# EAGLE board brushless (EAGLE 4.16)
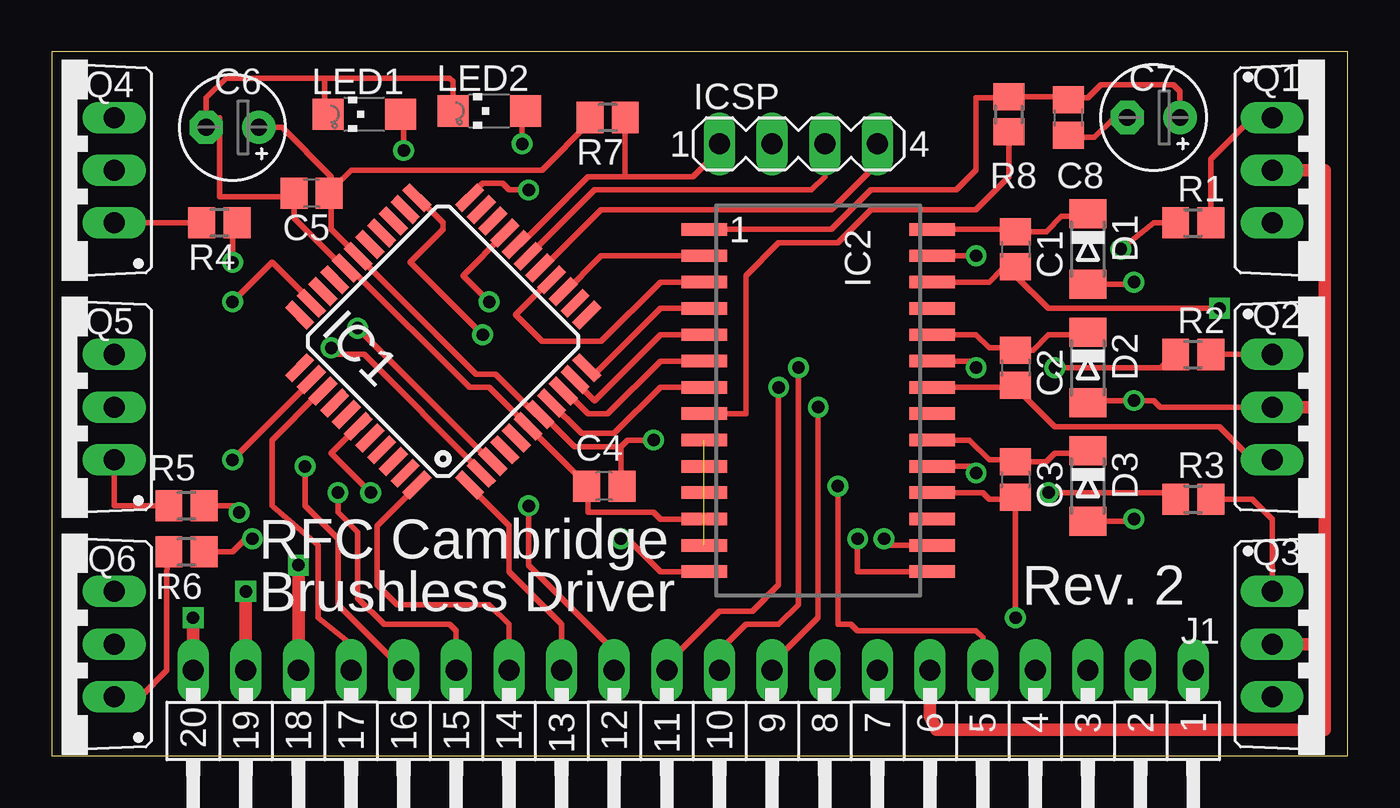
[diagram p0: board, top side]
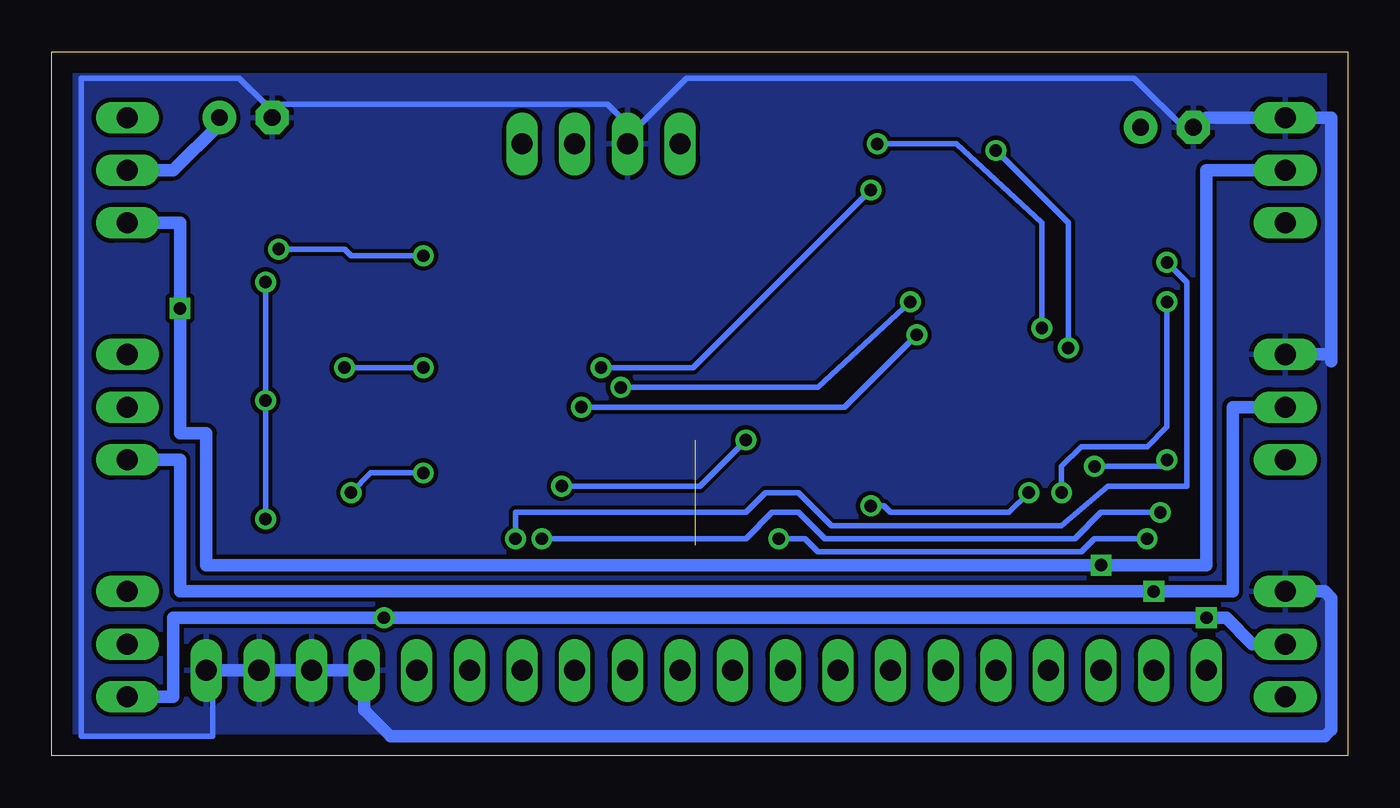
[diagram p1: board, bottom side, seen from below]

Size 62.54 x 33.96 mm. Coordinates in mm from the lower left corner, seen from the top.
Outline: 0,0 62.54,0 62.54,33.96 0,33.96 0,0
Copper layers (1*16): Top 0.035mm / dielectric 1.5mm / Bottom 0.035mm
Design rules "default": minimum track width 10mil, minimum drill 24mil, track to track 8mil, track to pad 8mil, pad to pad 8mil, via to via 8mil, smd to smd 8mil, copper to edge 40mil, drill to drill 8mil, minimum pad ring 10mil, minimum via ring 8mil, stop-mask expansion 4mil, vias tented up to drill 0mil, thermal gap 10mil

## Footprints (pad centres in the part's own frame; a part is rotated, then mirrored left to right if it is on the bottom)
C0805 = smd 1.3 x 1.5: 1 -0.85,0; 2 0.85,0
E2,5-5 = drill 0.813 pad 1.6 round: + -1.27,0 | drill 0.813 pad 1.6 octagon: - 1.27,0
MINIMELF = smd 1.4 x 1.8: A 1.7,0; C -1.7,0
TQFP44 = smd 1.5 x 0.5: 1 -5.8,4; 2 -5.8,3.2; 3 -5.8,2.4; 4 -5.8,1.6; 5 -5.8,0.8; 6 -5.8,0; 7 -5.8,-0.8; 8 -5.8,-1.6; 9 -5.8,-2.4; 10 -5.8,-3.2; 11 -5.8,-4; 23 5.8,-4; 24 5.8,-3.2; 25 5.8,-2.4; 26 5.8,-1.6; 27 5.8,-0.8; 28 5.8,0; 29 5.8,0.8; 30 5.8,1.6; 31 5.8,2.4; 32 5.8,3.2; 33 5.8,4 | smd 0.5 x 1.5: 12 -4,-5.8; 13 -3.2,-5.8; 14 -2.4,-5.8; 15 -1.6,-5.8; 16 -0.8,-5.8; 17 0,-5.8; 18 0.8,-5.8; 19 1.6,-5.8; 20 2.4,-5.8; 21 3.2,-5.8; 22 4,-5.8; 34 4,5.8; 35 3.2,5.8; 36 2.4,5.8; 37 1.6,5.8; 38 0.8,5.8; 39 0,5.8; 40 -0.8,5.8; 41 -1.6,5.8; 42 -2.4,5.8; 43 -3.2,5.8; 44 -4,5.8
SOP28 = smd 0.6 x 2.2: 1 -8.255,-5.5; 2 -6.985,-5.5; 3 -5.715,-5.5; 4 -4.445,-5.5; 5 -3.175,-5.5; 6 -1.905,-5.5; 7 -0.635,-5.5; 8 0.635,-5.5; 9 1.905,-5.5; 10 3.175,-5.5; 11 4.445,-5.5; 12 5.715,-5.5; 13 6.985,-5.5; 14 8.255,-5.5; 15 8.255,5.5; 16 6.985,5.5; 17 5.715,5.5; 18 4.445,5.5; 19 3.175,5.5; 20 1.905,5.5; 21 0.635,5.5; 22 -0.635,5.5; 23 -1.905,5.5; 24 -3.175,5.5; 25 -4.445,5.5; 26 -5.715,5.5; 27 -6.985,5.5; 28 -8.255,5.5
MA04-1 = drill 1.016 long: 1 -3.81,0; 2 -1.27,0; 3 1.27,0; 4 3.81,0
MA20-1W = drill 1.016 long: 1 -24.13,0; 2 -21.59,0; 3 -19.05,0; 4 -16.51,0; 5 -13.97,0; 6 -11.43,0; 7 -8.89,0; 8 -6.35,0; 9 -3.81,0; 10 -1.27,0; 11 1.27,0; 12 3.81,0; 13 6.35,0; 14 8.89,0; 15 11.43,0; 16 13.97,0; 17 16.51,0; 18 19.05,0; 19 21.59,0; 20 24.13,0
CHIPLED_1206 = smd 1.5 x 1.5: A 0,-1.75; C 0,1.75
TO220BV = drill 1.016 long: D 0,-2.54; G -2.54,-2.54; S 2.54,-2.54
R0805 = smd 1.3 x 1.5: 1 -0.85,0; 2 0.85,0

## Placement (x,y rotation side)
C1  [C0805]  46.51,24.44 270 top
C2  [C0805]  46.51,18.73 270 top
C3  [C0805]  46.51,13.33 270 top
C4  [C0805]  26.66,13.01 180 top
C5  [C0805]  12.54,27.14 180 top
C6  [E2,5-5]  8.73,30.32 180 top
C7  [E2,5-5]  53.18,30.79 180 top
C8  [C0805]  49.05,30.79 270 top
D1  [MINIMELF]  50,24.44 270 top
D2  [MINIMELF]  50,18.73 270 top
D3  [MINIMELF]  50,13.01 270 top
IC1  [TQFP44]  18.89,20 135 top
IC2  [SOP28]  36.98,17.14 270 top
ICSP  [MA04-1]  36.03,29.52 0 top
J1  [MA20-1W]  30.95,4.12 180 top
LED1  [CHIPLED_1206]  15.07,30.95 90 top
LED2  [CHIPLED_1206]  21.11,31.11 90 top
Q1  [TO220BV]  61.43,28.25 270 top
Q2  [TO220BV]  61.43,16.82 270 top
Q3  [TO220BV]  61.43,5.39 270 top
Q4  [TO220BV]  0.47,28.25 90 top
Q5  [TO220BV]  0.47,16.82 90 top
Q6  [TO220BV]  0.47,5.39 90 top
R1  [R0805]  55.08,25.71 0 top
R2  [R0805]  55.08,19.36 0 top
R3  [R0805]  55.08,12.38 0 top
R4  [R0805]  8.09,25.71 180 top
R5  [R0805]  6.5,12.06 180 top
R6  [R0805]  6.5,9.84 180 top
R7  [R0805]  26.82,30.79 180 top
R8  [R0805]  46.19,30.95 90 top

## Library data of the parts
C1-C8 R1-R8 = rcl
D1-D3 = diode
IC1 = microchip
IC2 = transistor-fet
ICSP J1 = con-lstb
LED1 LED2 = led
Q1-Q6 = transistor-power

## Nets
+5V: C4.1 C5.1 C6.+ IC1.7 IC1.28 J1.5 R7.2
+12V: C7.+ C8.1 D1.A D2.A D3.A IC2.1 J1.6 Q1.D Q2.D Q3.D R8.2
DIR: IC1.39 J1.12
GND: C4.2 C5.2 C6.- C7.- C8.2 IC1.6 IC1.29 IC2.9 IC2.12 IC2.13 ICSP.2 J1.1 J1.2 J1.3 J1.4 LED1.C LED2.C Q4.S Q5.S Q6.S
H1: IC1.14 IC2.2
H2: IC1.15 IC2.3
H3: IC1.11 IC2.4
HALL1: IC1.32 J1.15
HALL2: IC1.35 J1.16
HALL3: IC1.36 J1.17
KD: IC1.26
KI: IC1.25
KP: IC1.24
L1: IC1.10 IC2.5
L2: IC1.9 IC2.6
L3: IC1.8 IC2.7
N$1: IC2.27 R1.1
N$2: IC1.2 LED1.A
N$3: IC1.3 LED2.A
N$4: C1.1 D1.C IC2.28
N$5: C2.1 D2.C IC2.24
N$6: Q1.G R1.2
N$7: C3.1 D3.C IC2.20
N$9: IC1.18 ICSP.1 R7.1
N$12: IC2.16 R4.1
N$13: Q4.G R4.2
N$14: IC2.15 R5.1
N$15: IC2.14 R6.1
N$16: Q5.G R5.2
N$17: Q6.G R6.2
N$18: IC2.23 R2.1
N$19: Q2.G R2.2
N$20: Q3.G R3.2
N$21: IC2.19 R3.1
N$22: IC1.17 ICSP.3
N$23: IC1.16 ICSP.4
N$31: IC2.8 R8.1
PH1: C1.2 IC2.26 J1.18 Q1.S Q4.D
PH2: C2.2 IC2.22 J1.19 Q2.S Q5.D
PH3: C3.2 IC2.18 J1.20 Q3.S Q6.D
QEA: IC1.22 J1.10
QEB: IC1.23 J1.9
RX: IC1.1 J1.13
SPEED: IC1.19 J1.11
TX: IC1.44 J1.14

## Tracks (layer width: path | path; a pad name or v marks a point on that pad's centre or on a via)
+5V  (via drill 0.6)
  Top 0.254: 27.46,14.92 25.23,14.92 23.69,16.46 IC1.7 23.37,16.46 21.43,18.41 20.47,18.41 IC1.28 13.49,25.4 13.49,26.98 | C4.1 27.46,13.01 27.46,14.92 | v37.93,13.01 37.93,6.35 38.57,6.35 38.89,6.03 44.6,6.03 44.92,5.71 J1.5 | v29.04,15.23 27.77,15.23 27.46,14.92 | C6.+ 11.11,30.32 13.49,27.94 13.49,27.3 | 13.49,26.98 13.38,27.08 C5.1 13.38,27.2 13.49,27.3 | 13.49,26.98 13.49,27.3 | R7.2 25.97,30.58 23.65,28.25 14.44,28.25 13.49,27.3
  Bottom 0.254: v37.93,13.01 31.27,13.01 v29.04,15.23
+12V  (via drill 0.6)
  Top 0.254: D1.A 52.43,22.74 v52.22,22.85 | D2.A 50,17.14 v52.22,17.14 53.18,17.14 53.49,16.82 Q2.D | D3.A 52.43,11.31 v52.22,11.43 | IC2.1 37.62,25.4 39.52,27.3 43.65,27.3 44.6,28.25 44.6,31.75 46.19,31.75 R8.2 | 45.71,31.59 45.87,31.43 | 45.71,31.59 45.56,31.75 | C7.+ 54.44,32.06 54.13,32.38 50.64,32.38 50,31.75 49.05,31.75 | R8.2 48.99,31.8 49.05,31.75 | 49.05,31.75 C8.1 | 45.71,31.59 46.19,32.06 R8.2
  Top 0.61: 61.43,5.39 61.43,1.26 42.7,1.26 42.38,1.9 J1.6 | 61.43,5.39 Q3.D | 61.43,16.82 Q2.D | 61.43,5.39 61.43,16.82 | Q1.D 61.43,28.25 61.43,16.82
  Bottom 0.254: v52.22,22.85 v52.22,17.14 v52.22,11.43
  Bottom 0.61: C7.+ 54.44,30.47 56.67,28.25 Q1.D
DIR  (via drill 0.6)
  Top 0.254: J1.12 27.14,5.07 23.01,9.2 v23.01,12.06 | v15.39,12.7 13.49,14.6 IC1.39
  Bottom 0.254: v23.01,12.06 22.38,12.06 22.06,11.74 16.34,11.74 v15.39,12.7
GND  (2 unrouted)
  Top 0.254: C7.- 51.27,30.79 50.32,29.84 49.05,29.84 C8.2 | 25.87,13.01 C4.2 | 23.01,15.87 25.87,13.01 | 23.01,15.87 IC1.6 | 23.01,15.87 21.11,17.78 20.16,17.78 14.4,23.53 IC1.29 14.17,23.53 14.12,23.49 11.69,25.93 C5.2 11.9,26.98 8.09,26.98 8.09,30.79 C6.- 7.46,31.75 8.41,32.7 13.17,32.7 | 25.87,13.01 25.87,11.74 29.04,11.74 29.36,11.43 IC2.12 | LED2.C 19.36,32.54 19.2,32.7 13.17,32.7 | LED1.C 13.17,30.79 13.17,32.7
  Bottom 0.254: 52.22,31.43 53.49,32.7 61.11,32.7 61.11,0.95 54.76,0.95 54.76,3.49 J1.1 | 34.44,30.16 35.71,31.43 52.22,31.43 | 52.22,31.43 C7.- | 34.44,30.16 31.9,32.7 10.31,32.7 7.77,30.16 C6.- | 34.44,30.16 ICSP.2
  Bottom 0.61: J1.1 J1.2 J1.3 J1.4 47.46,2.22 46.19,0.95 1.11,0.95 0.79,1.26 0.79,7.62 1.11,7.93 Q6.S | 0.79,19.36 0.79,19.04 | 0.79,19.36 Q5.S | 0.79,19.36 0.79,30.79 Q4.S 6.82,30.79 7.46,30.16 | 7.46,30.16 | C6.- 7.46,30.16
  pour Bottom: -1.75,-3.5 -1.75,35.24 64.92,35.24 64.92,-3.5
H1
  Top 0.254: 24.68,22.3 24.6,22.22 | IC1.14 24.68,22.3 | IC2.2 26.5,24.13 24.68,22.3
H2
  Top 0.254: IC1.15 24.08,22.97 22.38,21.27 23.65,20 26.5,20 29.36,22.85 IC2.3
H3
  Top 0.254: IC1.11 26.13,18.35 29.36,21.58 IC2.4
HALL1  (via drill 0.6)
  Top 0.254: J1.15 19.52,6.03 19.2,6.35 16.03,6.35 14.76,7.62 14.76,10.79 13.8,11.74 v13.8,12.7 | v8.72,21.9 10.63,23.81 12.54,21.9 12.52,21.89 IC1.32
  Bottom 0.254: v13.8,12.7 13.8,13.96 12.85,14.92 9.68,14.92 8.72,15.87 v8.72,21.9
HALL2  (via drill 0.6)
  Top 0.254: J1.16 13.8,7.3 13.8,10.47 12.22,12.06 v12.22,13.96 | IC1.35 12.52,18.11 12.54,18.09 v8.72,14.28
  Bottom 0.254: v12.22,13.96 9.04,13.96 v8.72,14.28
HALL3
  Top 0.254: J1.17 14.44,5.39 12.85,6.66 12.85,10.15 10.63,12.06 10.63,15.23 12.85,17.46 13.09,17.54 IC1.36
L1
  Top 0.254: IC2.5 29.36,20.31 26.19,17.14 25.23,18.09 25.25,18.11 IC1.10
L2
  Top 0.254: IC1.9 24.78,17.59 25.87,16.51 26.82,16.51 29.36,19.04 IC2.6
L3
  Top 0.254: IC2.7 29.36,17.78 27.14,15.55 25.55,15.55 24.08,17.03 | 24.08,17.03 23.96,17.14 | IC1.8 24.08,17.03
N$1  (via drill 0.6)
  Top 0.254: IC2.27 v44.6,24.13 | v51.59,24.44 53.18,25.71 R1.1
  Bottom 0.254: v44.6,24.13 48.1,24.13 48.41,24.44 v51.59,24.44
N$2  (via drill 0.6)
  Top 0.254: IC1.2 20.72,13.71 15.07,19.36 13.8,19.36 v13.49,19.68 | LED1.A 16.66,31.11 | LED1.A | v16.98,29.2 16.98,30.79 LED1.A
  Bottom 0.254: v13.49,19.68 13.49,25.71 v16.98,29.2
N$3  (via drill 0.6)
  Top 0.254: IC1.3 21.19,14.2 v14.76,20.63 | LED2.A 22.86,30.95 22.7,30.79 v22.7,29.52
  Bottom 0.254: v14.76,20.63 14.76,25.71 18.89,29.52 v22.7,29.52
N$4
  Top 0.254: IC2.28 46.51,25.4 C1.1 47.99,25.29 48.73,26.03 50,26.03 D1.C
N$5
  Top 0.254: IC2.24 44.6,20.31 45.24,19.68 46.51,19.68 C2.1 47.36,19.58 48.1,20.31 50,20.31 D2.C
N$6
  Top 0.254: R1.2 55.93,28.79 57.94,30.79 Q1.G
N$7
  Top 0.254: IC2.20 44.29,15.23 45.24,14.28 46.51,14.28 C3.1 47.99,14.18 48.41,14.6 49.68,14.6 49.79,14.71 D3.C
N$9
  Top 0.254: IC1.18 22.6,24.66 25.87,27.94 27.77,27.94 | ICSP.1 32.22,29.2 30.95,27.94 27.77,27.94 | R7.1 27.67,28.04 27.77,27.94
N$12  (via drill 0.6)
  Top 0.254: IC2.16 40.16,10.15 v40.16,10.47 | R4.1 8.94,25.81 8.72,26.03 v8.72,23.81
  Bottom 0.254: v40.16,10.47 40.16,11.74 29.04,11.74 28.09,12.7 26.5,12.7 24.92,11.11 13.8,11.11 11.58,13.01 7.77,13.01 7.77,22.85 v8.72,23.81
N$13
  Top 0.254: Q4.G R4.2
N$14  (via drill 0.6)
  Top 0.254: IC2.15 38.89,8.88 v38.89,10.47 | v9.04,11.74 9.04,12.06 R5.1
  Bottom 0.254: v38.89,10.47 29.04,10.47 27.77,11.74 26.5,11.74 25.23,10.47 13.17,10.47 11.9,11.74 v9.04,11.74
N$15  (via drill 0.6)
  Top 0.254: R6.1 8.72,9.84 9.36,10.47 v9.68,10.47 | v27.46,10.47 27.77,10.47 29.36,8.88 IC2.14
  Bottom 0.254: v9.68,10.47 12.22,10.47 12.85,9.84 25.55,9.84 26.19,10.47 v27.46,10.47
N$16
  Top 0.254: Q5.G 3.01,12.06 R5.2
  Bottom 0.61: Q5.G 3.01,13.96
N$17
  Top 0.254: R6.2 5.55,8.88 5.55,4.12 4.28,2.85 Q6.G
N$18  (via drill 0.6)
  Top 0.254: IC2.23 44.29,19.04 v44.6,18.73 | R2.1 54.13,19.36 53.49,18.73 v48.41,18.73
  Bottom 0.254: v44.6,18.73 v48.41,18.73
N$19
  Top 0.254: 55.71,19.36 R2.2 Q2.G
N$20
  Top 0.254: R3.2 57.94,12.38 58.89,11.43 Q3.G
N$21  (via drill 0.6)
  Top 0.254: IC2.19 44.29,13.96 v44.6,13.65 | R3.1 54.13,12.38 53.81,12.7 v48.1,12.7
  Bottom 0.254: v44.6,13.65 47.14,13.65 v48.1,12.7
N$22
  Top 0.254: IC1.17 26.19,27.3 36.67,27.3 37.3,27.94 ICSP.3
N$23
  Top 0.254: IC1.16 23.69,23.53 26.5,26.35 37.62,26.35 39.84,28.57 ICSP.4
N$31
  Top 0.254: IC2.8 33.49,16.51 33.49,23.17 35.08,24.76 37.93,24.76 39.52,26.35 44.6,26.35 46.19,27.94 R8.1 46.19,30.16
PH1  (via drill 0.6)
  Top 0.254: IC2.26 45.24,22.85 45.87,23.49 46.51,23.49 C1.2 46.51,23.17 48.1,21.58 v56.35,21.58
  Top 0.61: J1.18 v11.9,9.2
  Bottom 0.61: Q4.D 6.82,28.25 6.82,9.2 v11.9,9.2 55.08,9.2 55.08,15.55 56.35,15.55 v56.35,21.58 56.35,25.71 Q1.S
PH2  (via drill 0.6)
  Top 0.254: 46.51,17.78 IC2.22 | 46.51,17.78 C2.2 | 46.51,17.78 48.41,15.87 56.35,15.87 57.94,14.28 Q2.S
  Top 0.61: J1.19 v9.36,7.93
  Bottom 0.61: Q5.D 5.55,16.82 5.55,7.93 v9.36,7.93 56.35,7.93 56.35,14.28 Q2.S
PH3  (via drill 0.6)
  Top 0.254: IC2.18 44.92,12.7 45.24,12.38 46.51,12.38 C3.2 v46.51,6.66
  Top 0.61: v6.82,6.66 J1.20
  Bottom 0.61: Q6.D 4.6,5.39 5.87,6.66 v6.82,6.66 v46.51,6.66 56.67,6.66 56.67,2.85 Q3.S
QEA  (via drill 0.6)
  Top 0.254: J1.10 32.22,5.07 33.49,6.35 35.08,6.35 36.03,7.3 v36.03,18.73 | v23.01,27.3 22.06,27.3 21.74,27.62 20.79,27.62 20.1,26.93 | 19.84,26.67 20.1,26.93 | 20.1,26.93 IC1.22
  Bottom 0.254: v36.03,18.73 31.59,18.73 v23.01,27.3
QEB  (via drill 0.6)
  Top 0.254: J1.9 34.76,4.44 36.98,6.66 v36.98,16.82 | v20.79,20.31 17.3,23.81 18.89,25.4 18.89,25.71 17.61,26.98 IC1.23
  Bottom 0.254: v36.98,16.82 24.28,16.82 v20.79,20.31
RX
  Top 0.254: IC1.1 20.16,13.01 22.06,11.11 22.06,8.88 24.6,6.35 J1.13 24.6,3.81
SPEED  (via drill 0.6)
  Top 0.254: J1.11 29.68,4.44 32.22,6.98 33.81,6.98 35.08,8.25 v35.08,17.78 | IC1.19 21.85,25.19 19.84,23.17 v21.11,21.9
  Bottom 0.254: v35.08,17.78 25.55,17.78 v21.11,21.9
TX
  Top 0.254: IC1.44 17.61,13.01 15.71,11.11 15.71,8.25 16.66,7.3 21.11,7.3 22.06,6.35 J1.14

## Text on the board
tNames: RFC Cambridge | Rev. 2 | Brushless Driver